# Altium PCB pinus.PcbDoc
Units mm, origin at the board's own origin, x right, y up, seen from the top; angles counter-clockwise.
Board outline 271.21 x 164.45 mm, 2 copper layers (Top Layer, Bottom Layer); 68 components, 22 nets, 198 pads, 52 vias.
Unrouted connection lines stored in the file: 10.
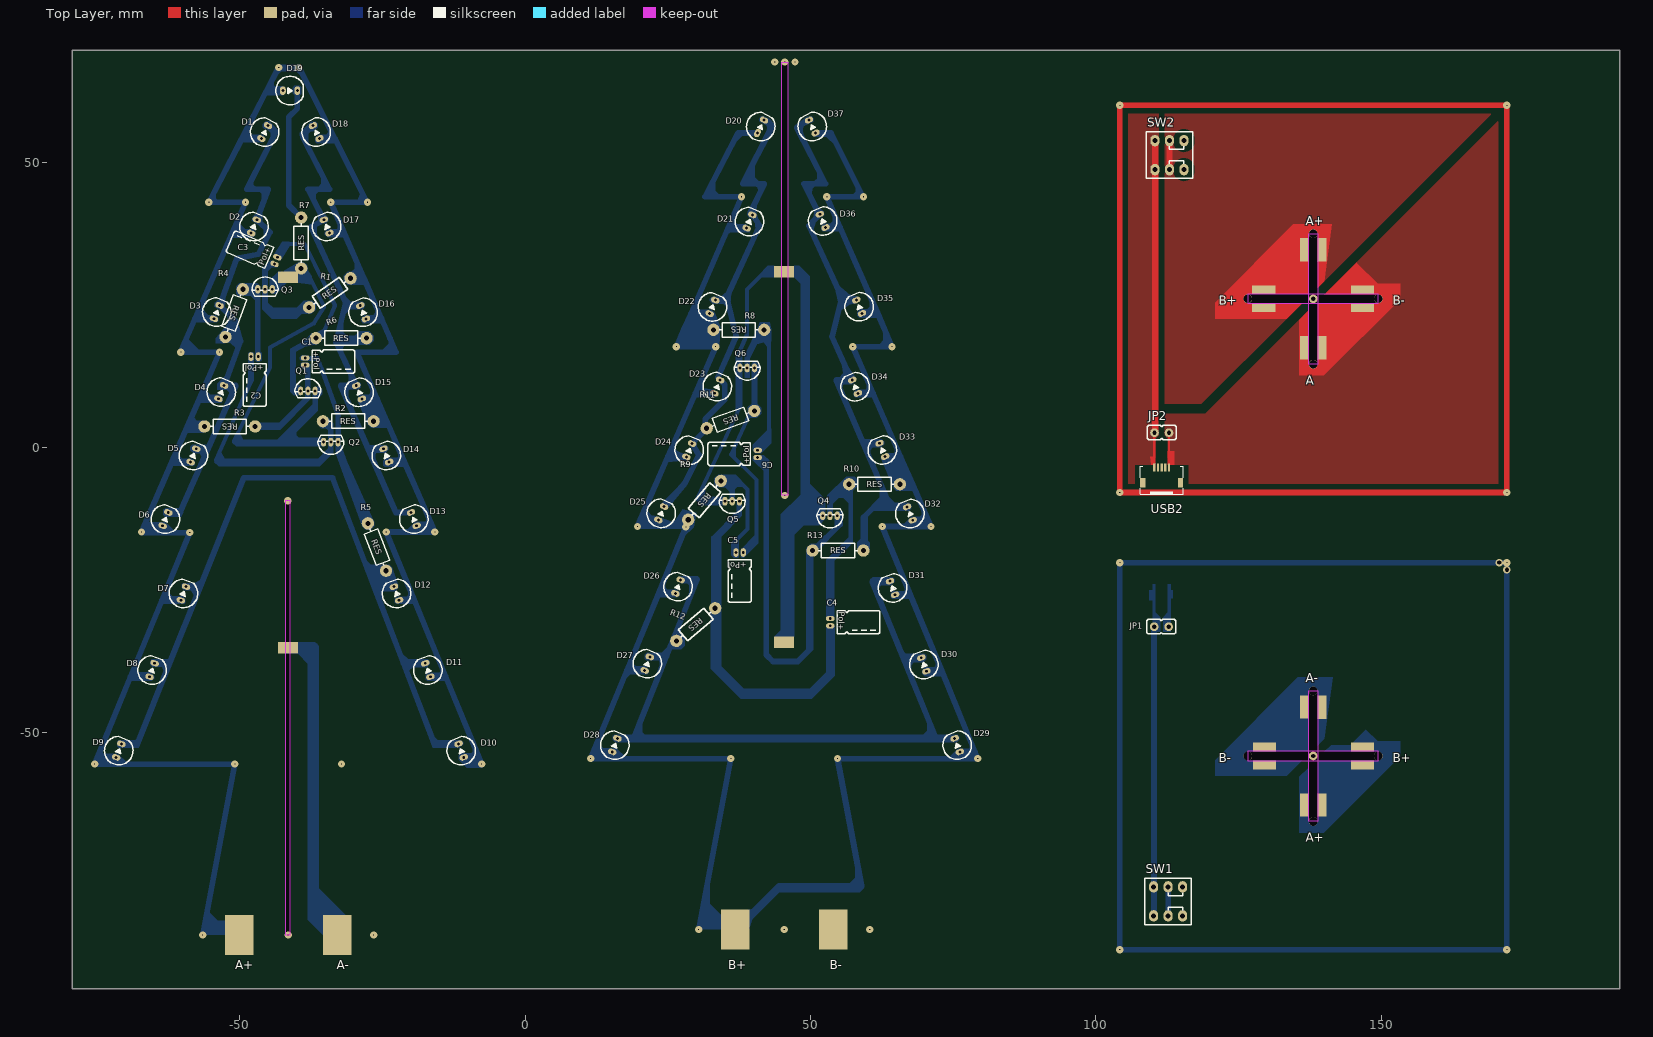
[diagram p0: Top Layer view]
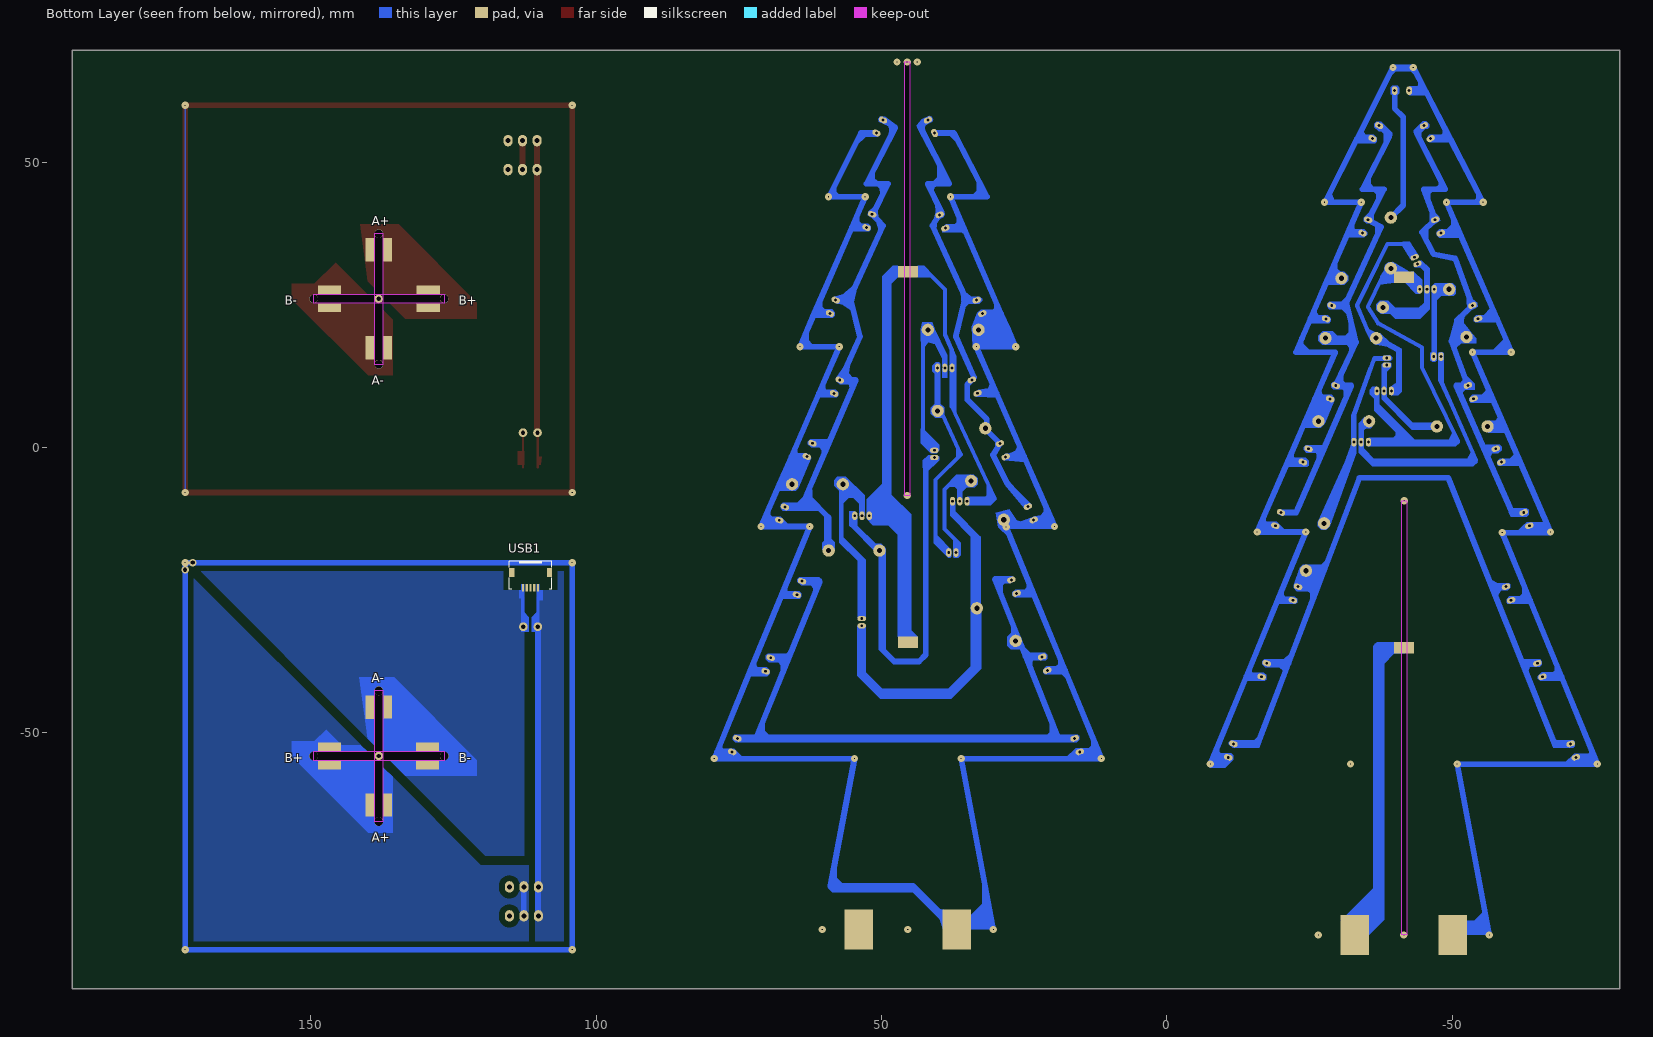
[diagram p1: Bottom Layer view, seen from below]

## Layer stack, top to bottom
Top Solder: solder mask 0.0102, Solder Resist, Dk 3.5
Top Layer: signal copper 0.0356
Dielectric 1: dielectric 0.32, FR-4, Dk 4.8
Bottom Layer: signal copper 0.0356
Bottom Solder: solder mask 0.0102, Solder Resist, Dk 3.5

## Board outline
-79.376,-94.798 -79.376,69.651 191.829,69.651 191.829,-94.798
cut-out: -42.052,-85.344 -41.132,-85.344 -41.132,-9.298 -42.052,-9.298
cut-out: 44.996,-8.375 44.996,67.559 45.998,67.559 45.998,-8.375
cut-out: 126.636,-54.867 149.496,-54.867 149.496,-53.217 126.636,-53.217
cut-out: 138.87,-42.639 138.87,-65.509 137.303,-65.509 137.303,-42.639
cut-out: 126.636,26.143
cut-out: 149.496,26.91 126.636,26.91 126.636,25.253 149.496,25.253
cut-out: 137.303,14.613 137.303,37.483 138.867,37.483 138.867,14.613

## Design rules (kind name [scope] priority, off if disabled: settings)
Clearance [All] p1: gap=1
PlaneConnect [All] p1: planeconnectstyle=Direct reliefexpansion=0.508 reliefentries=4 reliefconductorwidth=1.27 reliefairgap=0.254
PolygonConnect [All] p1: connectstyle=Direct reliefconductorwidth=0.254 reliefentries=4 polygonreliefangle="90 Angle" airgapwidth=0.254
RoutingVias [All] p1: holewidth=0.711 width=1.27 viastyle="Through Hole" minholewidth=0.711 minwidth=1.27 maxholewidth=0.711 maxwidth=1.27
SolderMaskExpansion [All] p1: expansion=0.102
Width [All] p1: maxlimit=1 minlimit=0.5 preferedwidth=0.7 minimp=50.000000 maximp=50.000000 favimp=50.000000
29 further rules are at their usual default settings.

## Components (designator, comment, footprint, x,y, rotation, side; value= is the part's Value field where it differs from the comment)
C1 "47uF" POL_160mil_HORIZONTAL#1 -38.537,15.087 r270 top
C2 "47uF" POL_160mil_HORIZONTAL#1 -47.398,15.951 r180 top
C3 "47uF" POL_160mil_HORIZONTAL#2 -43.661,32.765 r67 top
C4 "47uF" POL_160mil_HORIZONTAL#2 53.463,-30.58 r270 top
C5 "47uF" POL_160mil_HORIZONTAL#1 37.597,-18.386 r180 top
C6 "47uF" POL_160mil_HORIZONTAL#1 40.744,-1.108 r90 top
D1 "LED-200mil" LED-200mil#1 -45.631,55.284 r63 top
D2 "LED-200mil" LED-200mil#1 -47.503,38.76 r67 top
D3 "LED-200mil" LED-200mil#1 -54.031,23.749 r67 top
D4 "LED-200mil" LED-200mil#1 -53.243,9.728 r67 top
D5 "LED-200mil" LED-200mil#1 -58.12,-1.372 r67 top
D6 "LED-200mil" LED-200mil#1 -63.022,-12.523 r67 top
D7 "LED-200mil" LED-200mil#1 -59.873,-25.553 r69 top
D8 "LED-200mil" LED-200mil#1 -65.361,-38.972 r69 top
D9 "LED-200mil" LED-200mil#1 -71.203,-53.095 r69 top
D10 "LED-200mil" LED-200mil#1 -11.204,-53.095 r111 top
D11 "LED-200mil" LED-200mil#1 -17.046,-38.972 r111 top
D12 "LED-200mil" LED-200mil#1 -22.533,-25.553 r111 top
D13 "LED-200mil" LED-200mil#1 -19.5,-12.523 r113 top
D14 "LED-200mil" LED-200mil#1 -24.326,-1.371 r113 top
D15 "LED-200mil" LED-200mil#1 -29.101,9.703 r113 top
D16 "LED-200mil" LED-200mil#1 -28.39,23.724 r113 top
D17 "LED-200mil" LED-200mil#1 -34.777,38.76 r113 top
D18 "LED-200mil" LED-200mil#1 -36.606,55.295 r117 top
D19 "LED-200mil" LED-200mil#1 -41.18,62.549 r0 top
D20 "LED-200mil" LED-200mil#2 41.288,56.249 r63 top
D21 "LED-200mil" LED-200mil#1 39.312,39.621 r67 top
D22 "LED-200mil" LED-200mil#1 32.838,24.664 r67 top
D23 "LED-200mil" LED-200mil#1 33.676,10.693 r67 top
D24 "LED-200mil" LED-200mil#1 28.753,-0.453 r67 top
D25 "LED-200mil" LED-200mil#1 23.843,-11.504 r67 top
D26 "LED-200mil" LED-200mil#1 26.787,-24.358 r69 top
D27 "LED-200mil" LED-200mil#1 21.407,-37.856 r69 top
D28 "LED-200mil" LED-200mil#1 15.716,-52.129 r69 top
D29 "LED-200mil" LED-200mil#1 75.715,-52.129 r111 top
D30 "LED-200mil" LED-200mil#1 69.873,-38.007 r111 top
D31 "LED-200mil" LED-200mil#1 64.386,-24.588 r111 top
D32 "LED-200mil" LED-200mil#1 67.419,-11.557 r113 top
D33 "LED-200mil" LED-200mil#1 62.593,-0.406 r113 top
D34 "LED-200mil" LED-200mil#1 57.817,10.668 r113 top
D35 "LED-200mil" LED-200mil#1 58.529,24.689 r113 top
D36 "LED-200mil" LED-200mil#1 52.141,39.725 r113 top
D37 "LED-200mil" LED-200mil#1 50.313,56.261 r117 top
JP1 "JP_2" JP_2 111.491,-31.387 r0 top
JP2 "JP_2" JP_2 111.551,2.615 r0 top
Q1 "S9014" S9014 -38.059,9.925 r180 top
Q2 "S9014" S9014 -34.041,0.965 r0 top
Q3 "S9014" S9014 -45.567,27.747 r180 top
Q4 "S9014" S9014 53.417,-11.934 r0 top
Q5 "S9014" S9014 36.292,-9.392 r0 top
Q6 "S9014" S9014 38.909,13.964 r0 top
R1 "4.7K" RES -34.219,27.127 r35 top
R2 "4.7K" RES -30.993,4.622 r0 top
R3 "4.7K" RES -51.745,3.708 r180 top
R4 "100R" RES -50.977,23.567 r250 top
R5 "100R" RES -25.964,-17.425 r291 top
R6 "100R" RES -32.23,19.181 r0 top
R7 "100R" RES -39.244,35.859 r90 top
R8 "4.7K" RES 37.446,20.644 r180 top
R9 "4.7K" RES 31.437,-9.238 r230 top
R10 "4.7K" RES 61.226,-6.42 r0 top
R11 "100R" RES 35.99,4.912 r200 top
R12 "100R" RES 29.899,-31.008 r220 top
R13 "100R" RES 54.82,-18.042 r0 top
SW1 "switch" switch 112.669,-79.506 r270 top
SW2 "switch" switch 112.908,51.25 r270 top
USB1 "microUSB" MicroUSB_F_2#1 111.506,-23.241 r270 bottom
USB2 "microUSB" MicroUSB_F_2#2 111.534,-4.816 r90 top

## Footprints (in the part's own frame and the unit in brackets; to place one, negate y for a bottom-side part, rotate by r counter-clockwise, add the part's x,y. Pads: shape width x height; smd on the part's side, far side on the other; paste and mask are expansions set on the pad)
JP_2 [mil] "jump"
  round 60 hole 30: 1(-50,0) 2(50,0)
  silkscreen extent -100,-50 100,50
LED-200mil#1 [mil] "LED 2 chân size 200x350-mil"
  oval 40x60 hole 20: A(-50,0) C(50,0)
  silkscreen extent -98,-98 90,98
LED-200mil#2 [mil] "LED 2 chân size 200x350-mil"
  oval 60x40 hole 20: A(-50,0)
  oval 40x60 hole 20: C(50,0)
  silkscreen extent -98,-98 90,98
MicroUSB_F_2#1 [mm]
  rect 1.35x0.4 smd: 1(1.338,1.3) 2(1.338,0.65) 3(1.338,0) 4(1.338,-0.65) 5(1.338,-1.3)
  rect 1.6x0.9 smd: 6(-1.337,-3.3) 6(-1.337,3.3)
  rect 1.6x0.9 on Bottom Paste: 6(-1.337,-3.3) 6(-1.337,3.3)
  silkscreen extent -3.41,-3.75 1.59,3.75, body extent -3.94,-4.1 1.49,4.1, height 2.72
MicroUSB_F_2#2 [mm]
  rect 1.35x0.4 smd: 1(1.338,1.3) 2(1.338,0.65) 3(1.338,0) 4(1.338,-0.65) 5(1.338,-1.3)
  rect 1.6x0.9 smd: 6(-1.337,3.3) 6(-1.337,-3.3)
  rect 1.6x0.9 on Top Paste: 6(-1.337,3.3) 6(-1.337,-3.3)
  silkscreen extent -3.41,-3.75 1.59,3.75, body extent -3.94,-4.1 1.49,4.1, height 2.72
POL_160mil_HORIZONTAL#1 [mm]
  oval 0.9x1.524 hole 0.5: +(-0.635,0) -(0.635,0)
  silkscreen extent -2.03,1.27 2.03,8.71
POL_160mil_HORIZONTAL#2 [mm]
  oval 0.9x1.524 hole 0.5: +(0.635,0) -(-0.635,0)
  silkscreen extent -2.03,1.27 2.03,8.71
RES [mil]
  round 85 hole 35: 1(-175,0) 2(175,0)
  silkscreen extent -135,-50 135,50
S9014 [mm]
  oval 0.9x1.524 hole 0.5: 1(-1.27,0) 2(0,0) 3(1.27,0)
  silkscreen extent -2.29,-2.15 2.29,1.2
switch [mm]
  oval 2x1.6 hole 0.9: 1(-2.54,2.54) 2(-2.54,0) 3(-2.54,-2.54) 4(2.54,2.54) 5(2.54,0) 6(2.54,-2.54)
  silkscreen extent -4.06,-4.06 4.06,4.06

## Part data
C1 C2 C3 C4 C5 C6: library part Pol-Cap, "T? di?n phân c?c"
R1 R2 R3 R4 R5 R6 R7 R8 R9 R10 R11 R12 R13: library part RES, "di?n tr? size nh?"

## Free pads (board coordinates)
  rect 5x7 all layers, no hole: 2(-50.106,-85.405) 2(-32.91,-85.405) 2(36.813,-84.44) 2(54.009,-84.44)
  rect 3.5x2 all layers, no hole: 2(-41.52,-35.088) 2(-41.52,29.86) 2(45.398,-34.122) 2(45.398,30.825)
  round 1.524 hole 0.762: 3(138.08,-54.027) 3(138.11,26.057)
  round 1.524 hole 1.524: 4(126.636,26.081) 4(126.636,-54.042) 4(138.085,14.613) 4(138.085,37.483) 4(138.087,-65.509) 4(138.087,-42.639) 4(149.496,26.073) 4(149.496,-54.042)
  rect 1.524x4.064 all layers, no hole: 8(139.624,17.501) 8(139.624,34.671) 8(139.629,-45.492) 8(139.645,-62.623) 9(136.542,-45.47) 9(136.55,17.501) 9(136.55,34.671) 9(136.568,-62.615)
  rect 4.064x1.524 all layers, no hole: 9(129.413,24.486) 9(129.413,27.661) 9(129.557,-55.63) 9(129.557,-52.455) 9(146.727,24.492) 9(146.727,27.667) 9(146.728,-55.63) 9(146.728,-52.455)

## Via types
v1: diameter 1.27, hole 0, Top Layer to Bottom Layer, 50 vias
v2: diameter 1.27, hole 0.711, Top Layer to Bottom Layer, 2 vias

## Nets (pads, with @x,y where several pads share a name; then routed paths per layer and width w, separated by ;. In a path a pad name is that pad's centre, name@x,y a point inside that pad or via, vN(x,y) a via of type N, cw(c..) or ccw(c..) an arc to the next point about the centre after c; other vN are vias at no path point)
+5: JP1.1 JP2.1 SW1.3 SW1.6 SW2.3 SW2.6 USB1.1 USB2.1 | length 112.9
  Top Layer w0.4: USB2.1 JP2.1@110.234,2.615
  Top Layer w1: JP2.1@110.234,2.615 JP2.1 110.368,2.615 SW2.6 SW2.3
  Bottom Layer w0.4: JP1.1@110.192,-31.358 110.192,-26.573
  Bottom Layer w0.7: JP1.1@110.192,-31.358 JP1.1
  Bottom Layer w1: SW1.6@110.192,-82.046 110.192,-76.842 110.192,-31.387 JP1.1@110.192,-31.358
GND: JP1.2 JP2.2 pad.2@45.398,30.825 pad.2@45.398,-34.122 pad.2@54.009,-84.44 pad.2@-32.91,-85.405 pad.2@-41.52,29.86 pad.2@-41.52,-35.088 pad.4@126.636,-54.042 pad.4@138.085,14.613 pad.4@138.087,-42.639 pad.4@149.496,26.073 pad.8@139.624,17.501 pad.8@139.629,-45.492 pad.9@129.557,-52.455 pad.9@129.557,-55.63 pad.9@136.55,17.501 pad.9@136.542,-45.47 pad.9@146.727,24.492 pad.9@146.727,27.667 Q1.1 Q2.1 Q3.1 Q4.1 Q5.1 Q6.1 R7.1 USB1.5 USB2.5 | length 261.8
  Top Layer w0.4: USB2.5 JP2.2@112.834,2.615
  Top Layer w0.7: JP2.2 JP2.2@112.834,2.615
  Bottom Layer w0.4: JP1.2@112.792,-31.357 112.792,-26.573
  Bottom Layer w0.5: 37.655,8.382 37.639,8.397 Q6.1 37.639,16.885 37.718,16.964
  Bottom Layer w0.7: Q3.1 -41.631,29.992 -41.546,30.063 -41.52,29.86 -37.71,29.86 -35.202,24.678 -37.033,21.768 -44.667,17.577 -44.667,14.148 -51.029,1.092 -42.672,1.092 ; Q1.1 -36.789,6.975 -42.672,1.092 ; Q2.1 -35.438,1.092 -42.672,1.092 ; pad.2@-32.91,-85.405 pad.2@-32.91,-84.922 ; Q5.1 31.313,-9.392 cw(c31.313,-7.778) 30.172,-8.919 37.711,7.248 ; 37.653,16.992 38.883,19.834 38.883,27.692 42.016,30.825 pad.2@44.265,30.825 ; pad.2@45.373,31.029 45.398,30.825 48.566,30.825 48.566,-8.248 Q4.1@52.2,-11.882 ; pad.2@45.398,-34.122 45.398,-15.672 49.136,-11.934 Q4.1 ; JP1.2 JP1.2@112.792,-31.357
  Bottom Layer w2: pad.2@-41.52,-35.088 -37.126,-35.088 -37.126,-81.189 pad.2@-32.91,-85.405
NetC1_+: C1.+ Q2.3 R5.1 | length 32.7
  Bottom Layer w0.7: C1.+ -36.362,15.722 -32.771,5.593 Q2.3 R5.1
NetC1_-: C1.- Q1.2 R3.1 | length 17.3
  Bottom Layer w0.7: R3.1 -43.035,3.708 -38.059,8.683 Q1.2 -38.059,13.975 C1.-
NetC2_+: C2.+ Q3.3 R4.1 | length 11.8
  Bottom Layer w0.7: Q3.3 -46.837,16.025 C2.+
  Bottom Layer w1: R4.1@-49.824,28.216 R4.1@-49.82,28.22
NetC2_-: C2.- Q2.2 R2.1 | length 46.1
  Bottom Layer w0.7: C2.- -48.033,11.715 -48.038,11.709 -54.204,-2.271 -35.958,-2.271 -34.041,-0.354 Q2.2 -34.041,3.331 R2.1@-35.385,4.675
NetC3_+: C3.+ Q1.3 R6.1 | length 36.6
  Bottom Layer w0.7: C3.+ -41.89,35.713 -38.643,35.713 -33.305,24.877 -35.298,20.27 -36.387,19.181 R6.1 -40.74,16.942 -40.74,11.441 Q1.3@-39.697,10.398
NetC3_-: C3.- Q3.2 R1.1 | length 17.1
  Bottom Layer w0.7: C3.- -45.542,31.217 -45.567,31.192 Q3.2 -45.567,24.912 -43.708,23.053 -40.224,23.053 R1.1@-38.227,25.05
NetC4_+: C4.+ Q5.3 R12.1 | length 62.3
  Bottom Layer w0.7: Q5.3 37.562,-11.488 35.475,-13.575 35.175,-13.575 32.894,-15.856 32.894,-37.644 37.85,-42.6 50,-42.6 53.463,-39.137 C4.+
NetC4_-: C4.- Q4.2 R10.1 | length 32.2
  Bottom Layer w0.7: Q4.2 53.417,-9.871 56.825,-6.464 56.975,-6.314 56.975,-16.175 53.5,-19.65 ; C4.- 53.463,-19.65
NetC5_+: C5.+ Q6.3 R11.1 | length 36.4
  Bottom Layer w0.7: C5.+ 40.538,-16.079 40.538,-5.631 36.115,-1.207 39.684,6.651 R11.1@39.799,6.905 ; R11.1 Q6.3
NetC5_-: C5.- Q5.2 R9.1 | length 20.8
  Bottom Layer w0.7: R9.1 36.35,-5.833 ; Q5.2 36.292,-5.891 36.35,-5.833 ; C5.- 36.962,-16.279 38.99,-14.251 38.99,-7.352 37.47,-5.833 36.35,-5.833
NetC6_+: C6.+ Q4.3 R13.1 | length 69.6
  Bottom Layer w0.7: C6.+ 42.249,-3.248 ; R13.1@50.007,-18.568 54.687,-13.888 Q4.3
  Bottom Layer w1: 42.249,-3.248 42.249,-36.282 43.426,-37.46 47.777,-37.46 50.007,-35.229 R13.1@50.007,-18.568
NetC6_-: C6.- Q6.2 R8.1 | length 30.7
  Bottom Layer w0.7: Q6.2 38.941,16.221 41.408,20.898 41.523,21.117 42.748,19.892 42.748,1.531 C6.-
NetD1_A: D1.A D2.A D3.A D4.A D5.A D6.A D7.A D8.A D9.A D10.A D11.A D12.A D13.A D14.A D15.A D16.A D17.A D18.A D19.A D20.A D21.A D22.A D23.A D24.A D25.A D26.A D27.A D28.A D29.A D30.A D31.A D32.A D33.A D34.A D35.A D36.A D37.A pad.2@36.813,-84.44 pad.2@-50.106,-85.405 pad.4@126.636,26.081 pad.4@138.085,37.483 pad.4@138.087,-65.509 pad.4@149.496,-54.042 pad.8@139.624,34.671 pad.8@139.645,-62.623 pad.9@129.413,24.486 pad.9@129.413,27.661 pad.9@136.55,34.671 pad.9@136.568,-62.615 pad.9@146.728,-52.455 pad.9@146.728,-55.63 R1.2 R2.2 R3.2 R8.2 R9.2 R10.2 SW1.2 SW1.5 SW2.2 SW2.5 | length 926.8
  Top Layer w1: SW2.5 SW2.2
  Bottom Layer w0.7: v1(-67.225,-14.793) v1@-67.124,-14.895 ; v1@-60.418,16.728 v1(-60.325,16.728) ; pad.2@-50.106,-85.405 pad.2@-50.106,-84.911 ; v1@-43.139,66.597 v1@-43.13,66.614 ; R1.2@-30.945,30.149 R1.2@-30.802,30.292 ; D28.A@15.236,-53.34 D28.A ; v1@19.795,-13.929 v1(28.161,-13.929) ; D27.A@20.899,-38.989 D27.A ; D25.A@23.342,-12.678 D25.A ; D26.A@26.316,-25.527 D26.A ; v1(26.501,17.694) 26.536,17.694 v1@26.531,17.681 ; D23.A@33.175,9.528 D23.A ; 37.314,55.105 37.327,55.118 ; D37.A D37.A@50.9,55.118 ; R10.2@65.303,-5.947 R10.2@65.323,-5.927 ; 72.24,-37.297 72.8,-38.66 ; D29.A D29.A@76.207,-53.352
  Bottom Layer w1: D9.A -71.734,-54.356 -74.976,-54.356 ; v1(-67.225,-14.793) -66.757,-13.716 ; v1@-67.124,-14.895 v1(-58.758,-14.895) -63.627,-26.742 ; D8.A -65.82,-40.162 -69.143,-40.162 ; D6.A -63.543,-13.716 -66.757,-13.716 ; v1@-60.418,16.728 -60.403,16.762 -57.86,22.606 ; D7.A -60.331,-26.742 -63.627,-26.742 ; v1(-60.325,16.728) v1(-53.535,16.728) -57.105,8.509 ; D5.A D5.A -61.903,-2.54 ; R3.2 -56.215,3.683 -59.201,3.683 ; D3.A -54.553,22.606 -57.86,22.606 ; D4.A -53.789,8.509 -57.105,8.509 ; pad.2@-50.106,-84.911 -56.413,-84.911 v1(-50.868,-55.458) v1(-75.429,-55.458) -74.976,-54.356 ; v1(-48.988,42.992) v1@-48.999,42.967 ; D2.A D2.A -51.338,37.592 ; D1.A -46.259,54.1 -49.657,54.1 ; v1(-43.171,66.614) -45.291,62.525 ; v1@-43.13,66.614 v1(-39.641,66.614) -33.331,54.102 ; D19.A -45.291,62.525 ; D18.A -35.968,54.102 -33.331,54.102 ; D17.A -31.703,37.592 ; R1.2 -28.276,29.718 -25.181,22.606 ; D15.A -28.555,8.584 -25.969,8.584 ; -28.321,29.822 -31.703,37.592 ; D16.A -25.181,22.606 ; v1(-27.627,42.992) v1@-27.728,42.992 ; R2.2 -26.425,4.5 -24.195,4.5 ; D14.A -23.79,-2.5 -21.155,-2.5 ; D12.A -22.039,-26.7 -19.431,-26.7 ; D13.A -18.696,-14 -16.16,-14 ; D11.A -16.501,-40.068 -13.937,-40.068 ; D10.A -8.102,-54.28 ; -7.611,-55.458 -13.937,-40.068 ; D28.A@15.236,-53.34 11.963,-53.34 ; v1(19.694,-13.828) 20.193,-12.678 ; D27.A@20.899,-38.989 17.861,-38.989 ; D25.A@23.342,-12.678 20.193,-12.678 ; D26.A@26.316,-25.527 23.394,-25.527 ; v1(28.161,-13.929) 23.394,-25.527 ; D24.A 28.158,-1.524 25.037,-1.524 ; D22.A 32.328,23.481 29.057,23.481 ; R8.2 32.981,20.624 27.813,20.624 ; D23.A@33.175,9.528 29.838,9.528 ; 35.568,38.404 35.577,38.424 ; pad.2@36.813,-84.44 44.474,-76.779 58.936,-76.779 v1(54.746,-54.493) v1(79.307,-54.493) 78.838,-53.352 ; pad.2@36.813,-83.946 30.505,-83.946 v1(36.051,-54.493) v1(11.489,-54.493) 11.963,-53.34 ; 37.314,55.105 31.505,43.957 37.92,43.932 35.577,38.424 ; 37.327,55.118 D20.A ; D21.A 35.605,38.452 35.577,38.424 ; D37.A@50.9,55.118 53.599,55.118 59.191,43.957 v1(52.866,43.957) 55.194,38.608 ; D36.A 52.69,38.608 55.194,38.608 ; D34.A 58.339,9.525 60.96,9.525 ; D35.A 59.05,23.495 61.771,23.495 ; D33.A 63.099,-1.585 65.786,-1.585 ; D31.A 67.507,-25.781 ; R10.2 67.853,-6.42 67.911,-6.477 ; D32.A 67.945,-12.757 67.945,-13.828 ; D30.A 72.987,-39.116 ; D29.A@76.207,-53.352 78.838,-53.352 ; SW1.5 SW1.2 ; -74.976,-54.356 -69.143,-40.162 ; -69.143,-40.162 -63.627,-26.742 ; -66.757,-13.716 -61.903,-2.54 ; -61.903,-2.54 -59.201,3.683 ; -59.201,3.683 -57.105,8.509 ; -57.86,22.606 -51.338,37.592 ; -51.338,37.592 v1@-48.999,42.967 ; -49.657,54.1 v1(-55.414,42.992) -49.024,42.992 v1@-48.999,42.967 ; -49.657,54.1 -45.291,62.525 ; -33.331,54.102 v1@-27.728,42.992 ; -31.703,37.592 v1(-34.053,42.992) v1@-27.728,42.992 ; -25.969,8.584 -29.506,16.728 -22.623,16.728 -23.688,19.177 -25.181,22.606 ; -25.969,8.584 -24.195,4.5 ; -24.195,4.5 -21.155,-2.5 ; -21.155,-2.5 -16.16,-14 ; -19.431,-26.7 v1(-24.325,-14.793) v1(-15.816,-14.793) -16.16,-14 ; -19.431,-26.7 -13.937,-40.068 ; 11.963,-53.34 17.861,-38.989 ; 17.861,-38.989 23.394,-25.527 ; 20.193,-12.678 25.037,-1.524 ; 25.037,-1.524 29.838,9.528 ; 27.813,20.624 26.536,17.694 v1(33.384,17.694) 29.838,9.528 ; 27.813,20.624 29.057,23.481 ; 29.057,23.481 35.56,38.407 35.577,38.424 ; 55.194,38.608 61.771,23.495 ; 60.96,9.525 v1(57.413,17.694) v1(64.296,17.694) 61.771,23.495 ; 60.96,9.525 65.786,-1.585 ; 65.786,-1.585 67.911,-6.477 ; 67.507,-25.781 v1(62.594,-13.828) 67.945,-13.828 ; 67.507,-25.781 72.987,-39.116 ; 67.911,-6.477 v1(71.103,-13.828) 67.945,-13.828 ; 72.987,-39.116 78.838,-53.352
  other v1: -56.506,-85.405 30.412,-84.44 60.384,-84.44 59.292,43.957
NetD1_C: D1.C D2.C D3.C D4.C D5.C D6.C R4.2 | length 91.1
  Bottom Layer w1: D6.C -60.518,-11.354 ; -60.424,-11.26 -55.533,-0.127 ; D5.C -55.609,-0.203 -55.533,-0.127 ; R4.2 -50.12,19.39 -50.079,19.431 ; -50.725,10.897 D4.C -49.866,18.633 -50.079,19.431 ; -50.695,10.884 -55.533,-0.127 ; D1.C -43.765,55.126 -43.765,55.124 -48.785,45.278 -45,45.278 D2.C -44.679,37.746 -46.736,33.909 -50.525,33.132 D3.C -50.847,22.313 -50.079,19.431
NetD7_C: D7.C D8.C D9.C D10.C D11.C D12.C R5.2 | length 138.5
  Bottom Layer w0.7: -49.357,-5.243 -49.296,-5.303
  Bottom Layer w1: D9.C -67.962,-51.909 -67.962,-51.943 -62.269,-37.719 ; D8.C -64.906,-37.719 -62.269,-37.719 ; D7.C -59.417,-24.349 -56.919,-24.349 ; R5.2 -27.5,-21.575 -27.528,-21.547 ; D12.C -26.429,-24.367 -26.443,-24.381 ; D11.C -21.3,-37.787 -21.308,-37.795 ; D10.C -15.893,-51.909 -15.903,-51.919 -21.308,-37.795 ; -62.269,-37.719 -56.919,-24.349 ; -56.919,-24.349 -49.296,-5.303 -33.745,-5.303 -27.528,-21.547 ; -27.528,-21.547 -26.443,-24.381 ; -26.443,-24.381 -21.308,-37.795
NetD13_C: D13.C D14.C D15.C D16.C D17.C D18.C R6.2 | length 95.9
  Bottom Layer w0.7: -31.586,24.765 -31.458,24.893
  Bottom Layer w1: D18.C -38.989,54.621 -38.989,54.495 -34.256,45.278 -38.041,45.278 D17.C -37.52,38.656 -31.438,25.366 -31.586,24.765 -32.837,19.68 -33.006,18.99 ; -31.458,24.893 D16.C ; R6.2 -32.815,19.181 -33.006,18.99 ; D14.C -27.445,-0.202 -27.483,-0.241 ; D13.C -22.653,-11.354 -27.483,-0.241 ; -33.006,18.99 -33.13,18.488 D15.C -32.313,10.872 -27.483,-0.241
NetD19_C: D19.C R7.2 | length 23.8
  Bottom Layer w1: D19.C -39.91,59.404 -41.402,57.912 -41.402,42.462 R7.2
NetD20_C: D20.C D21.C D22.C D23.C D24.C D25.C R11.2 | length 83.9
  Bottom Layer w0.7: D23.C@33.804,12.335 D23.C@34.224,11.915 ; D21.C@39.545,41.367 39.562,41.338 D21.C@39.874,40.831
  Bottom Layer w1: D25.C 28.067,-6.096 30.48,-1.27 30.226,-0.889 D24.C 31.538,3.005 31.538,4.973 34.976,8.411 34.976,11.058 D23.C ; D22.C 35.07,25.833 35.073,25.829 35.315,26.356 ; D23.C@33.804,12.335 37.005,19.491 35.315,26.356 ; 35.302,26.406 35.315,26.356 ; D21.C@39.545,41.367 41.919,46.243 38.134,46.243 43.194,56.168 ; D21.C@39.874,40.831 41.06,38.898 35.315,26.356 ; D20.C@41.917,57.433 43.188,56.162
NetD26_C: D26.C D27.C D28.C D29.C D30.C D31.C R12.2 | length 130.8
  Bottom Layer w0.7: 30.054,-23.172 30.109,-23.118
  Bottom Layer w1: D28.C 19.054,-50.929 ; D27.C 24.665,-36.67 24.759,-36.576 ; D26.C 30.054,-23.172 ; 30.109,-23.118 25.926,-33.64 24.759,-36.576 ; D31.C 60.903,-23.402 60.81,-23.495 66.253,-36.83 ; D30.C 66.262,-36.821 66.253,-36.83 ; D29.C 75.245,-50.929 72.009,-50.929 ; 19.054,-50.929 72.009,-50.929 ; 19.054,-50.929 24.759,-36.576 ; 66.253,-36.83 72.009,-50.929
NetD32_C: D32.C D33.C D34.C D35.C D36.C D37.C R13.2 | length 101.6
  Bottom Layer w0.7: 55.372,25.888 55.481,26.331 ; D35.C@58.002,25.888 D35.C
  Bottom Layer w1: D37.C 47.6,56.103 52.663,46.243 48.878,46.243 D36.C@51.537,40.841 ; D36.C 49.733,38.894 55.49,26.335 ; 56.954,12.31 53.789,19.453 55.372,25.888 D35.C@58.002,25.888 ; D34.C 54.553,11.837 54.527,11.811 59.246,0.762 ; R13.2 59.265,-12.236 61.113,-10.388 64.008,-10.388 ; D33.C 59.246,0.762 ; D32.C 64.008,-10.388 ; 59.246,0.762 64.008,-10.388
pads on no net: SW1.1 SW1.4 SW2.1 SW2.4 USB1.2 USB1.3 USB1.4 USB1.6 USB2.2 USB2.3 USB2.4 USB2.6
copper on no net: | length 543.7
  Top Layer w1: v1@172.018,-7.848 v1(104.202,-7.848) v1(104.203,59.97) v1(172.02,59.97) ; v1@172.02,-7.846 v1(172.02,59.97)
  Bottom Layer w0.7: 19.694,-13.828 19.795,-13.929 ; 36.813,-84.44 36.813,-83.946 ; 54.009,-84.44 54.009,-83.957
  Bottom Layer w1: v1@172.018,-7.848 v1@172.02,-7.846 ; v1(172.02,-20.153) v1(104.203,-20.153) v1(104.202,-87.97) v1(172.02,-87.97) 172.02,-87.968 v1(172.02,-20.153)
  other v1: -41.52,-85.405 -26.534,-85.405 45.398,-84.44 -32.173,-55.458 -7.611,-55.458 -41.592,-9.298 45.496,-8.377 172.02,-7.848 37.931,43.957 45.497,67.559 43.747,67.579 47.278,67.579
  other v2: 172.021,-21.403 170.688,-20.153

## Polygon pours and split planes (outlines as drawn)
no net on Bottom Layer "Bottom Layer-No Net" (solid, pour order 64): 170.832,-20.153
no net on Bottom Layer "Bottom Layer-No Net 3" (solid, pour order 68): 110.38,-25.785
no net on Bottom Layer "Bottom Layer-No Net 1" (solid, pour order 70): 172.02,-87.97 172.02,-20.833 172.021,-20.832
no net on Bottom Layer "Bottom Layer-No Net 2" (solid, pour order 74): 172.02,-87.97
no net on Bottom Layer "Bottom Layer-No Net" (solid, pour order 78): 170.832,59.969
no net on Bottom Layer "Bottom Layer-No Net 3" (solid, pour order 82): 110.38,54.337
no net on Bottom Layer "Bottom Layer-No Net 2" (solid, pour order 88): 172.02,-7.848
no net on Bottom Layer "Bottom Layer-No Net 1" (solid, pour order 84): 172.02,-7.848 172.02,59.289 172.021,59.29
GND on Bottom Layer "Bottom Layer-GND" (solid, pour order 92): 140.006,-50.98 170.832,-20.153 116.257,-20.153 116.257,-24.99 112.602,-24.99 112.602,-28.858 112.602,-71.494 119.477,-71.494 133.436,-57.535
NetD1_A on Bottom Layer "Bottom Layer-NetD1_A" (solid, pour order 94): 171.958,-21.403 172.021,-21.403 172.021,-87.967 111.775,-87.968 111.775,-73.144 120.217,-73.144
+5 on Bottom Layer "Bottom Layer-+5" (solid, pour order 96): 111.269,-32.262 111.269,-29.722 110.405,-28.858 110.405,-24.998 106.734,-24.998 106.734,-20.153 104.202,-20.153 104.202,-87.97 110.697,-87.97 110.697,-32.262
GND on Top Layer "Top Layer-GND" (solid, pour order 90): 172.014,58.776 172.02,-7.846 116.293,-7.848 116.293,-3.013 112.634,-3.013 112.634,1.552 112.057,2.128 112.057,5.965 119.203,5.965
+5 on Top Layer "Top Layer-+5" (solid, pour order 98): 110.245,-3.046 106.784,-3.046 106.784,-7.848 104.203,-7.848 104.203,59.97 111.041,59.97 111.041,2.158 110.433,1.55 110.433,-3.046
NetD1_A on Top Layer "Top Layer-NetD1_A" (solid, pour order 100): 140.005,29.142 170.832,59.969 112.116,59.969 112.116,7.645 118.495,7.645 133.436,22.587

## Other copper
Top Layer:
  region net NetD1_A: 140.005,29.142 138.868,28.005 138.868,37.483 137.303,37.483 137.303,26.924 126.636,26.924 126.636,25.248 136.097,25.248 133.436,22.587 120.921,22.587 120.921,25.381 134.637,39.097 141.368,39.097
  region net GND: 140.137,26.899 149.496,26.899 149.496,25.248 138.862,25.248 138.862,14.613 137.312,14.613 137.312,24.074 135.653,22.414 135.653,12.681 139.971,12.681 153.306,26.016 153.306,28.683 149.369,28.683 145.645,32.407
  region net GND: 112.634,-3.013 113.74,-3.013 113.74,-0.645 112.634,-0.645
  region net +5: 109.684,-3.046 110.244,-3.046 110.244,-1.576 109.576,-1.576
Bottom Layer:
  drawing of 286 lines, arcs and shapes, not listed

## Silkscreen, mask and mechanical layers (free items; w line width, h text height)
Top Overlay:
  text "A+" at 136.796,38.97 h1.52
  text "B+" at 121.556,25 h1.52
  text "B-" at 152.036,25 h1.52
  text "A" at 136.796,11.03 h1.52
  text "A-" at 136.796,-41.152 h1.52
  text "B-" at 121.556,-55.122 h1.52
  text "B+" at 152.036,-55.122 h1.52
  text "A+" at 136.796,-69.092 h1.52
  text "A+" at -50.8,-91.44 h1.52
  text "A-" at -33.02,-91.44 h1.52
  text "B+" at 35.56,-91.44 h1.52
  text "B-" at 53.34,-91.44 h1.52
Bottom Overlay:
  text "A+" at 139.336,38.97 h1.52
  text "B+" at 124.096,25 h1.52
  text "B-" at 154.576,25 h1.52
  text "A-" at 139.336,11.03 h1.52
  text "A-" at 139.336,-41.152 h1.52
  text "B-" at 124.096,-55.122 h1.52
  text "B+" at 154.576,-55.122 h1.52
  text "A+" at 139.336,-69.092 h1.52

## Text inside footprints (layer, text, board x,y; h text height)
C1: Top Overlay "+Pol" at -37.013,16.865 h1.02 r270
C2: Top Overlay "+Pol" at -45.772,14.452 h1.02 r180
C3: Top Overlay "Pol+" at -45.795,31.851 h1.02 r67
C4: Top Overlay "Pol+" at 54.965,-28.753 h1.02 r270
C5: Top Overlay "+Pol" at 38.867,-20.107 h1.02 r180
C6: Top Overlay "+Pol" at 39.269,-2.878 h1.02 r90
R1: Top Overlay "RES" at -35.072,25.909 h1.02 r35
R2: Top Overlay "RES" at -32.39,4.114 h1.02
R3: Top Overlay "RES" at -50.348,4.216 h1.02 r180
R4: Top Overlay "RES" at -50.976,25.053 h1.02 r250
R5: Top Overlay "RES" at -26.938,-16.303 h1.02 r291
R6: Top Overlay "RES" at -33.627,18.673 h1.02
R7: Top Overlay "RES" at -38.736,34.462 h1.02 r90
R8: Top Overlay "RES" at 38.843,21.152 h1.02 r180
R9: Top Overlay "RES" at 31.946,-7.841 h1.02 r230
R10: Top Overlay "RES" at 59.829,-6.928 h1.02
R11: Top Overlay "RES" at 37.129,5.867 h1.02 r200
R12: Top Overlay "RES" at 30.642,-29.721 h1.02 r220
R13: Top Overlay "RES" at 53.423,-18.55 h1.02